# Altium PCB FrontalKeyboardRGB - PCB.PcbDoc
Units mm, origin at the board's own origin, x right, y up, seen from the top; angles counter-clockwise.
Board outline 104.5 x 22.6 mm, 2 copper layers (Top Layer, Bottom Layer), stack 1.571 mm thick; 18 components, 14 nets, 62 pads, 0 vias.
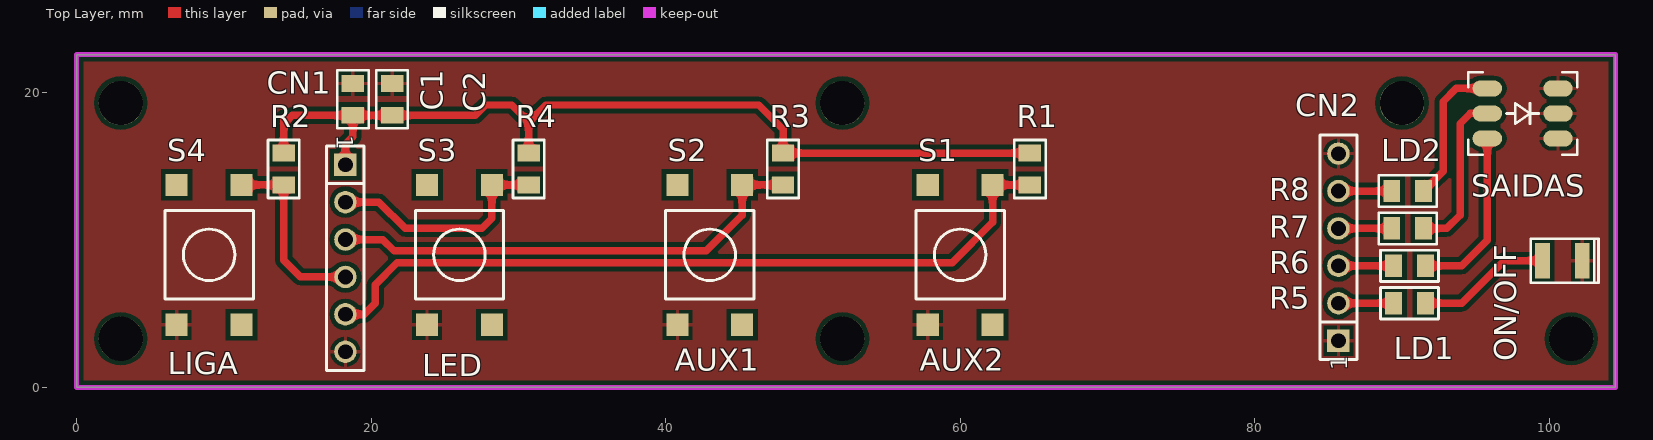
[diagram p0: Top Layer view]
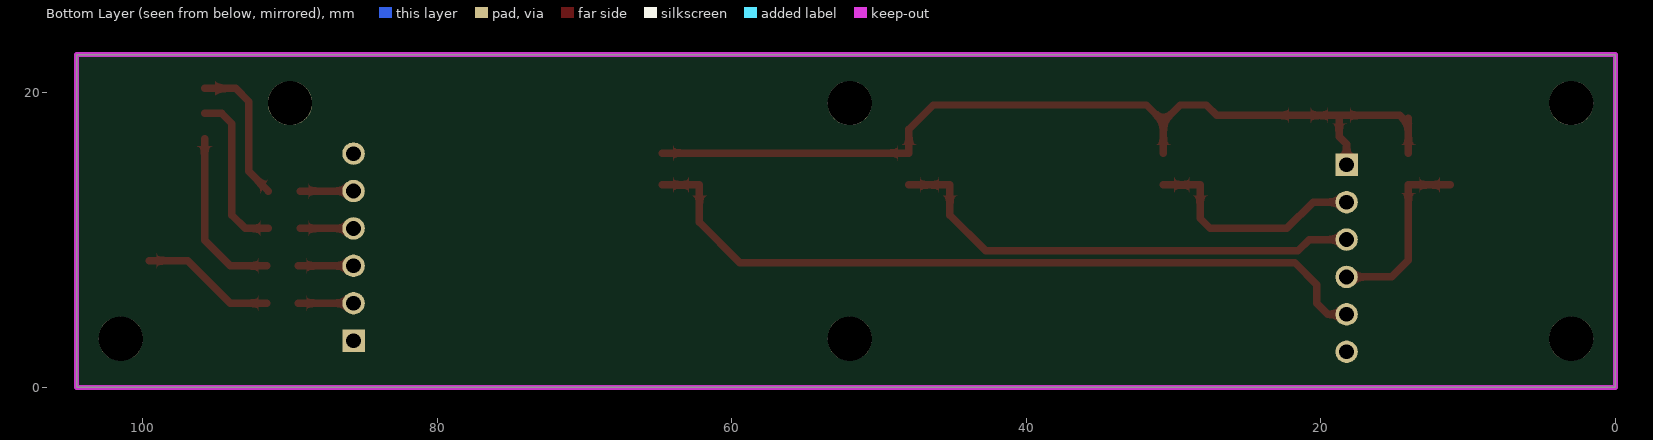
[diagram p1: Bottom Layer view, seen from below]
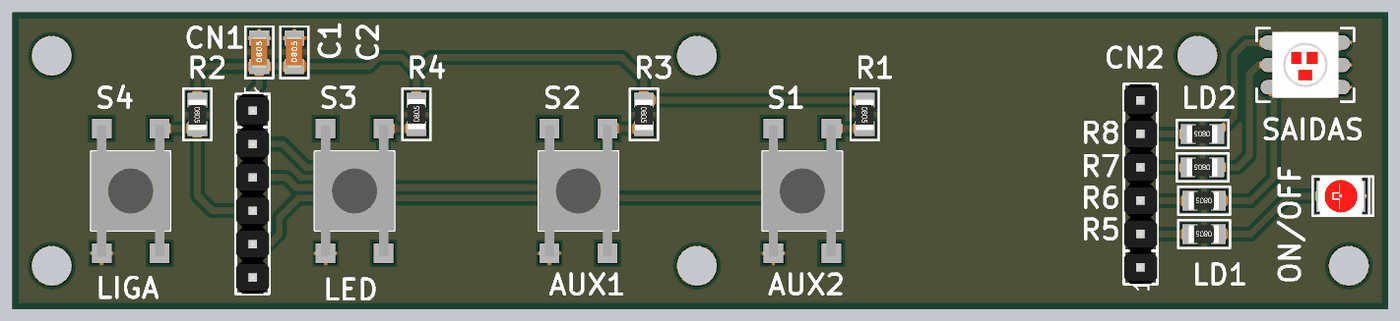
[diagram p2: 3D render of the assembled board from above, using the file's embedded part models]

## Layer stack, top to bottom
Top Solder: solder mask 0.0102, Solder Resist, Dk 3.5
Top Layer: signal copper 0.0356
Dielectric 1: core 1.5, FR-4, Dk 4.2
Bottom Layer: signal copper 0.0356

## Board outline
0,0 0,22.6 104.5,22.6 104.5,0

## Design rules (kind name [scope] priority, off if disabled: settings)
Clearance [All] p1: gap=0.305
MinimumSolderMaskSliver [All] p1: minsoldermaskwidth=0.025
PolygonConnect [All] p1: connectstyle=Relief reliefconductorwidth=0.254 reliefentries=4 polygonreliefangle="90 Angle" airgapwidth=0.254
RoutingVias [All] p1: holewidth=0.711 width=1.27 viastyle="Through Hole" minholewidth=0.711 minwidth=1.27 maxholewidth=0.711 maxwidth=1.27
SilkToSilkClearance [All] p1: silktosilkclearance=0.025
SilkToSolderMaskClearance [IsPad] p1: minsilkscreentomaskgap=0.025 clearancetoexposedcopper=TRUE
SolderMaskExpansion [All] p1: expansion=0.102
UnpouredPolygon [All] p1: allowunpoured=FALSE
Width [All] p1: maxlimit=2.54 minlimit=0.254 preferedwidth=0.254
26 further rules are at their usual default settings.

## Components (designator, comment, footprint, x,y, rotation, side; value= is the part's Value field where it differs from the comment)
C1 "1uF 50V" C0805 18.763,19.556 r90 top
C2 "100nF 50V" C0805 21.43,19.556 r90 top
CN1 "CON BARRA 1x6 180 MACHO PTH" BARRA6PM180 18.255,15.118 r270 top
CN2 "CON BARRA 1x6 180 MACHO PTH" BARRA6PM180 85.692,3.173 r90 top
LD1 "VERMELHO" LED3528-RED 100.9,8.6 r0 top
LD2 "RGB" LED-RGB-HL-AF-5060H248BS36FU76GC-S1-T1 98.2,18.6 r0 top
R1 "10K 1%" R0805 64.737,14.83 r270 top
R2 "10K 1%" R0805 14.064,14.83 r270 top
R3 "10K 1%" R0805 47.973,14.83 r270 top
R4 "10K 1%" R0805 30.701,14.83 r90 top
R5 "220R 1%" R0805 90.518,5.713 r180 top
R6 "220R 1%" R0805 90.518,8.253 r180 top
R7 "220R 1%" R0805 90.391,10.793 r180 top
R8 "220R 1%" R0805 90.391,13.333 r180 top
S1 "TECLA SMD 4,3mm" TECLA_TS-06M-ASM 60,9 r270 top
S2 "TECLA SMD 4,3mm" TECLA_TS-06M-ASM 43,9 r270 top
S3 "TECLA SMD 4,3mm" TECLA_TS-06M-ASM 26,9 r270 top
S4 "TECLA SMD 4,3mm" TECLA_TS-06M-ASM 9,9 r270 top

## Footprints (in the part's own frame and the unit in brackets; to place one, negate y for a bottom-side part, rotate by r counter-clockwise, add the part's x,y. Pads: shape width x height; smd on the part's side, far side on the other; paste and mask are expansions set on the pad)
BARRA6PM180 [mil]
  rect 60x60 hole 39.4: 1(0,0)
  round 60 hole 39.4: 2(100,0) 3(200,0) 4(300,0) 5(400,0) 6(500,0)
  silkscreen extent -50,-50 550,50, body extent -50,-50 550,50, height 330
C0805 [mil]
  rect 45x60 smd: 1(-42.5,0) 2(42.5,0)
  silkscreen extent -78,-42 78,42, body extent -49,-24 49,25, height 31
LED3528-RED [mm]
  rect 1x2.4 smd: 1(-1.35,0) 2(1.35,0)
  silkscreen extent -2.15,-1.5 2.45,1.5, body extent -1.75,-1.4 1.75,1.4, height 1.48
LED-RGB-HL-AF-5060H248BS36FU76GC-S1-T1 [mm]
  oval 2x1.1 smd: 1(-2.4,1.7) 2(-2.4,0) 3(-2.4,-1.7) 4(2.4,-1.7) 5(2.4,0) 6(2.4,1.7)
  silkscreen extent -3.7,-2.8 3.7,2.8, body extent -2.7,-2.5 2.7,2.5, height 1.59
R0805 [mil]
  rect 45x60 smd: 1(-42.5,0) 2(42.5,0)
  silkscreen extent -78,-42 78,42, body extent -44,-27 46,27, height 34
TECLA_TS-06M-ASM [mm]
  rect 1.5x1.5 smd: 1(-4.75,2.2) 2(4.75,-2.2) 3(4.75,2.2) 4(-4.75,-2.2)
  silkscreen extent -3,-3 3,3, body extent -5,-3.02 5,3.03, height 4.7

## Part data
C1: library part "CC 1uF 50V 0805"
C2: library part "CC 100nF 50V 0805"
CN1 CN2: "Barra de pinos simples 1x6 180g. 2,54mm"
LD1: library part "LED VM 3528", "LED SMT 3528"
LD2: library part "LED RGB 5060", "LED SMT 5060"
R1 R2 R3 R4: library part "RES 10K 1% 0805", "RES 10K 1% 0805"
R5 R6 R7 R8: library part "RES 220R 1% 0805", "RES 220R 1% 0805"
S1 S2 S3 S4: library part "TEC TACTIL 4,3MM SMD", "TECLA TACTIL 4,3MM SMD"

## Free pads (board coordinates)
  round 3 hole 3: 0(3,3.3) 0(3,19.3) 0(52,3.3) 0(52,19.3) 0(90,19.3) 0(101.5,3.3)

## Nets (pads, with @x,y where several pads share a name; then routed paths per layer and width w, separated by ;. In a path a pad name is that pad's centre, name@x,y a point inside that pad or via, vN(x,y) a via of type N, cw(c..) or ccw(c..) an arc to the next point about the centre after c; other vN are vias at no path point)
+5V: C1.1 C2.1 CN1.1 R1.1 R2.1 R3.1 R4.2 | length 62.5
  Top Layer w0.508: R2.1 14.064,17.905 ; 14.064,18.286 14.064,17.905 ; CN1.1 18.255,16.508 18.763,17.016 C1.1 ; R4.2 30.701,18.032 ; R1.1 R3.1 47.973,17.519 46.317,19.175 31.844,19.175 30.701,18.032 ; 14.064,17.905 14.636,18.477 C1.1 ; C1.1 C2.1 27.082,18.477 27.78,19.175 29.558,19.175 30.701,18.032
GND: C1.2 C2.2 CN1.6 CN2.1 CN2.6 LD1.2 LD2.4 LD2.5 LD2.6 S1.2 S2.2 S3.2 S4.2
NetCN1_2: CN1.2 R4.1 S3.1 | length 15.7
  Top Layer w0.508: CN1.2 20.534,12.578 22.314,10.799 27.532,10.799 28.2,11.467 S3.1 R4.1
NetCN1_3: CN1.3 R3.2 S2.1 | length 33.1
  Top Layer w0.508: CN1.3 20.788,10.038 21.557,9.269 42.766,9.269 45.2,11.703 S2.1 R3.2
NetCN1_4: CN1.4 R2.2 S4.1 | length 12.6
  Top Layer w0.508: S4.1 R2.2 14.064,8.634 15.2,7.498 CN1.4
NetCN1_5: CN1.5 R1.2 S1.1 | length 52.4
  Top Layer w0.508: CN1.5 19.532,4.958 20.287,5.713 20.287,6.983 21.76,8.457 59.457,8.457 62.2,11.2 S1.1 R1.2
NetCN2_2: CN2.2 R5.2 | length 3.7
  Top Layer w0.508: CN2.2 R5.2
NetCN2_3: CN2.3 R6.2 | length 3.7
  Top Layer w0.508: CN2.3 R6.2
NetCN2_4: CN2.4 R7.2 | length 3.6
  Top Layer w0.508: CN2.4 R7.2
NetCN2_5: CN2.5 R8.2 | length 3.6
  Top Layer w0.508: CN2.5 R8.2
NetLD1_1: LD1.1 R5.1 | length 9.1
  Top Layer w0.508: R5.1 94.074,5.713 96.961,8.6 LD1.1
NetLD2_1: LD2.1 R8.1 | length 10
  Top Layer w0.508: R8.1 92.804,14.667 92.804,19.411 93.693,20.3 LD2.1
NetLD2_2: LD2.2 R7.1 | length 11.2
  Top Layer w0.508: R7.1 93.058,10.793 93.946,11.681 93.946,17.905 94.64,18.6 LD2.2
NetLD2_3: LD2.3 R6.1 | length 11.8
  Top Layer w0.508: R6.1 94.074,8.253 95.8,9.979 LD2.3
pads on no net: S1.3 S1.4 S2.3 S2.4 S3.3 S3.4 S4.3 S4.4

## Polygon pours and split planes (outlines as drawn)
GND on Top Layer "Bottom Layer-No Net" (solid, remove dead copper, pour order 2): 0,22.6 0,0 104.488,0 104.5,0 104.5,22.6

## Keep-outs
Keep-Out Layer:
  the board outline again, w0.35

## Silkscreen, mask and mechanical layers (free items; w line width, h text height)
Top Overlay:
  text "SAIDAS" at 94.709,12.952 h1.52
  text "ON/OFF" at 97.757,1.776 h1.52 r90
  text "AUX1" at 40.607,1.141 h1.52
  text "AUX2" at 57.244,1.142 h1.52
  text "LIGA" at 6.19,0.887 h1.52
  text "LED" at 23.462,0.76 h1.52
Board Outline:
  the board outline again, w0.35
Mechanical 11:
  circle w0.254: c26,9 r0.2
  circle w0.254: c43,9 r0.2
  circle w0.254: c60,9 r0.2
  circle w0.254: c98.2,18.6 r0.2
  circle w0.254: c100.9,8.6 r0.2
  circle w0.254: c9,9 r0.2
  circle w0.254: c52,3.3 r1.5
  circle w0.254: c52,19.3 r1.5
  circle w0.254: c3,19.3 r1.5
  circle w0.254: c3,3.3 r1.5
  circle w0.254: c90,19.3 r1.5
  circle w0.254: c101.5,3.3 r1.5
  lines w0.254: 0,0 0,22.6 104.5,22.6 104.5,0 0,0

## Text inside footprints (layer, text, board x,y; h text height)
CN1: Top Overlay "1" at 17.655,17.118 h1.11 r270
CN2: Top Overlay "1" at 86.292,1.173 h1.11 r90